# EAGLE board 1IRTG4=Pittonet Benjamin PIC v2 (EAGLE 7.7.0)
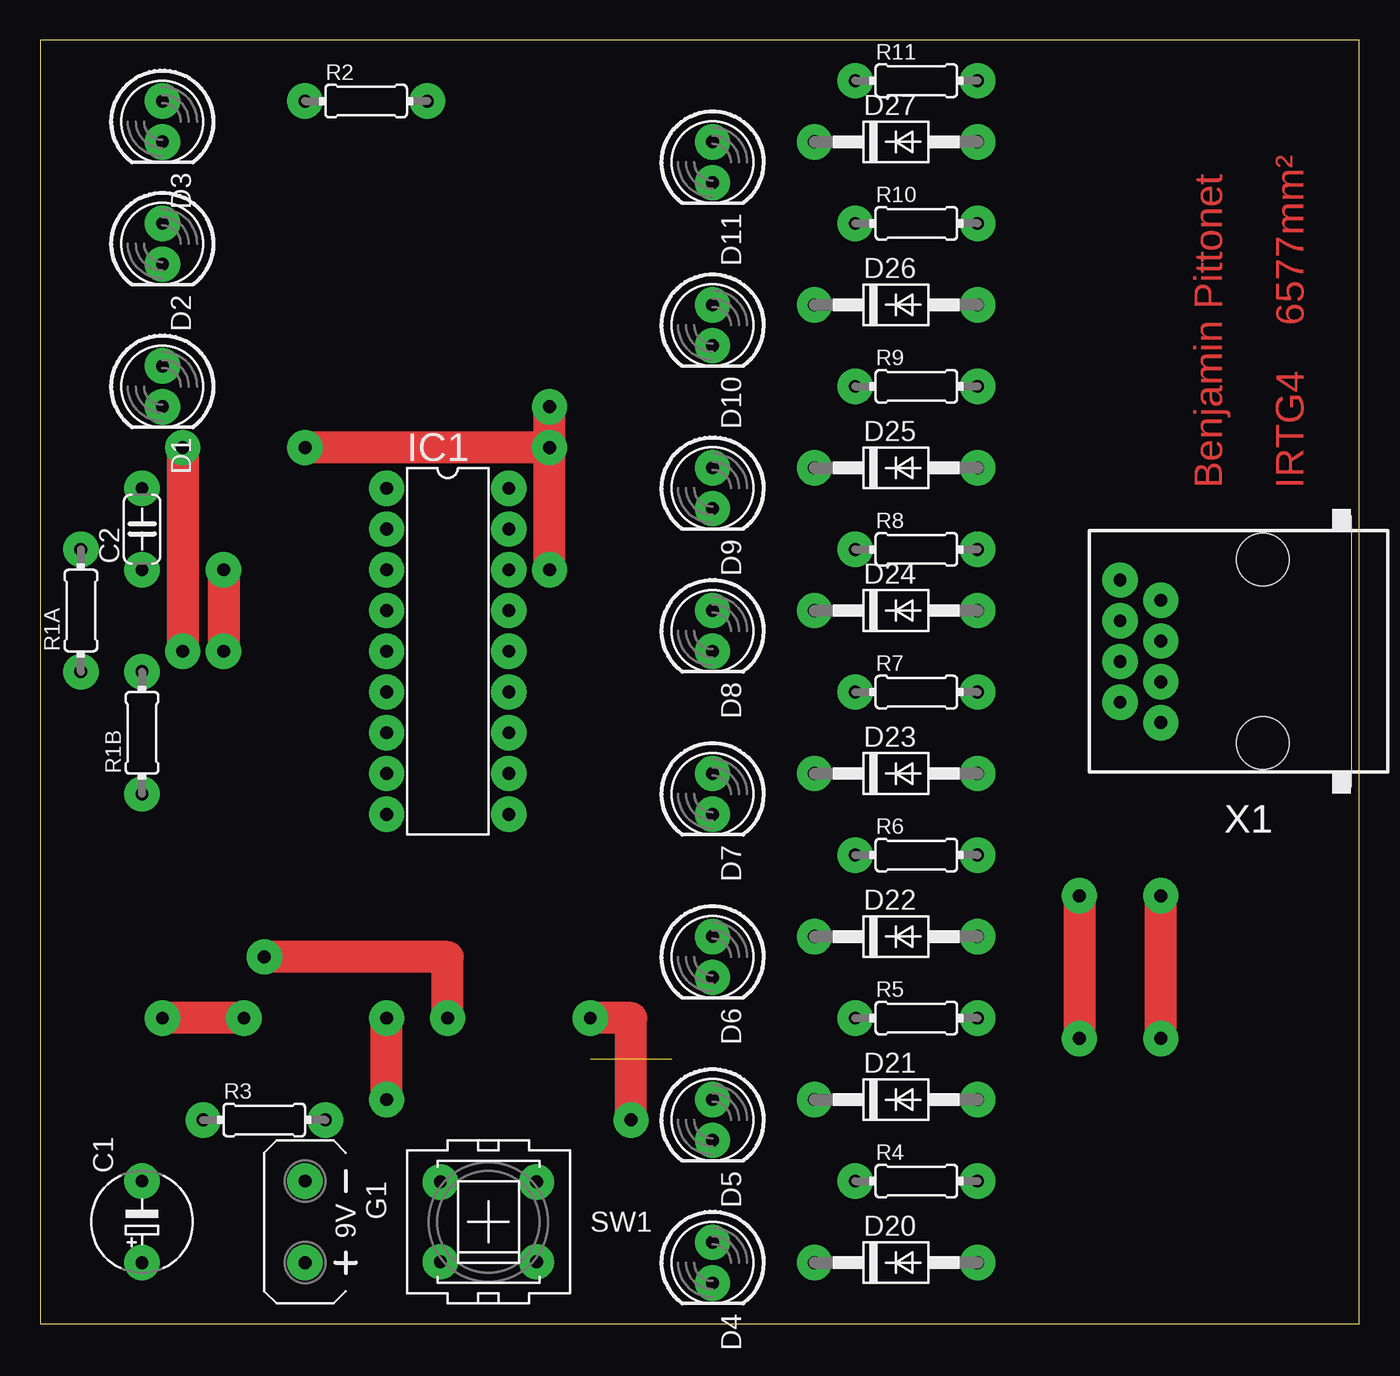
[diagram p0: board, top side]
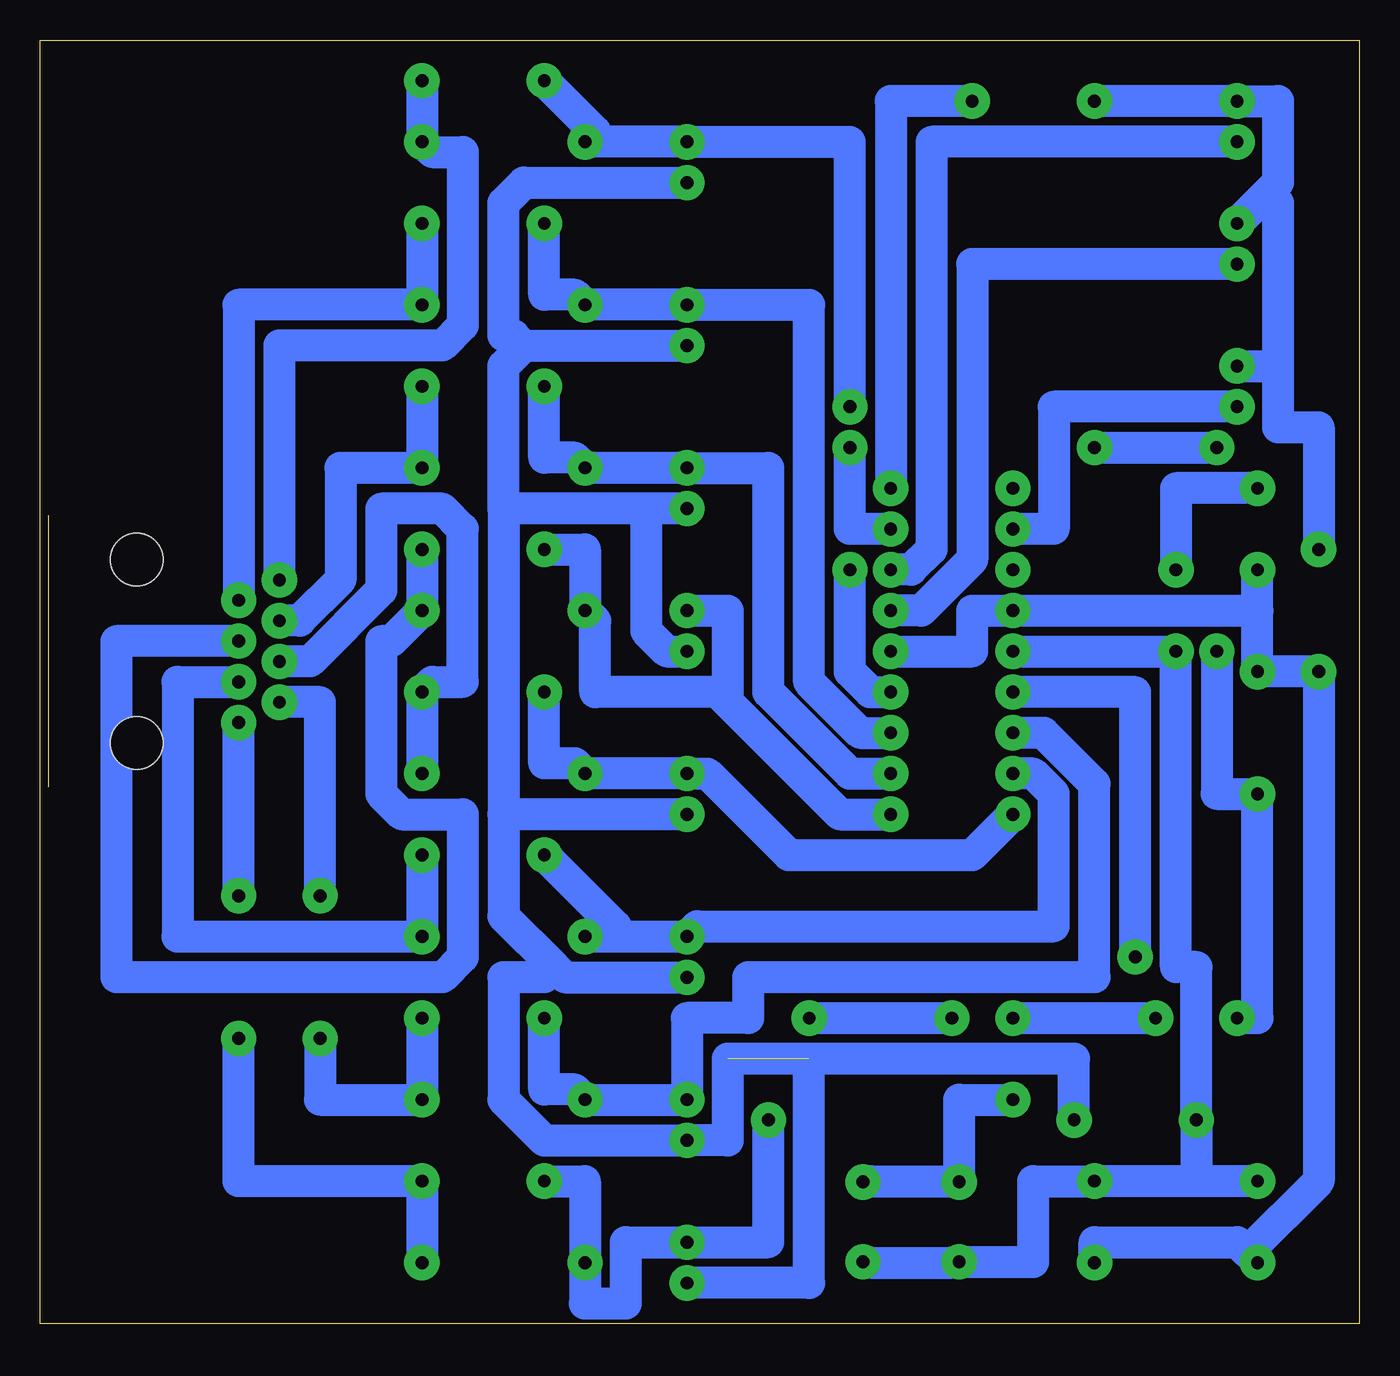
[diagram p1: board, bottom side, seen from below]

Size 82.22 x 80 mm. Coordinates in mm from the lower left corner, seen from the top.
Outline: 0,0 82.22,0 82.22,80 0,80 0,0
Copper layers (1*16): Top 0.035mm / dielectric 1.5mm / Bottom 0.035mm
Design rules "default": minimum track width 10mil, minimum drill 24mil, track to track 8mil, track to pad 8mil, pad to pad 8mil, via to via 8mil, smd to smd 8mil, copper to edge 40mil, drill to drill 8mil, minimum pad ring 10mil, minimum via ring 8mil, stop-mask expansion 4mil, vias tented up to drill 0mil, thermal gap 10mil
Net classes: 0 default: width 2 mm, drill 0.8 mm, clearance 0.2 mm

## Footprints (pad centres in the part's own frame; a part is rotated, then mirrored left to right if it is on the bottom)
E5-6 = drill 0.8 pad 2.2: + -2.54,0; - 2.54,0
C050-024X044 = drill 0.8 pad 2.2: 1 -2.54,0; 2 2.54,0
LED5MM = drill 0.8 pad 2.2: A -1.27,0; K 1.27,0
DO41-10 = drill 0.8 pad 2.2: A 5.08,0; C -5.08,0
AB9V = drill 0.8 pad 2.2: + 0,2.54; - 0,-2.54
DIL18 = drill 0.8 pad 2.2: 1 -10.16,-3.81; 2 -7.62,-3.81; 3 -5.08,-3.81; 4 -2.54,-3.81; 5 0,-3.81; 6 2.54,-3.81; 7 5.08,-3.81; 8 7.62,-3.81; 9 10.16,-3.81; 10 10.16,3.81; 11 7.62,3.81; 12 5.08,3.81; 13 2.54,3.81; 14 0,3.81; 15 -2.54,3.81; 16 -5.08,3.81; 17 -7.62,3.81; 18 -10.16,3.81
0204/7 = drill 0.8 pad 2.2: 1 -3.81,0; 2 3.81,0
PVA1R = drill 0.8 pad 2.2: 1 -2.997,2.489; 2 -2.997,-2.489; 3 2.997,2.489; 4 2.997,-2.489
RJ45-NO-SHIELD = drill 0.8 pad 2.2: 1 -4.445,6.35; 2 -3.175,8.89; 3 -1.905,6.35; 4 -0.635,8.89; 5 0.635,6.35; 6 1.905,8.89; 7 3.175,6.35; 8 4.445,8.89 | hole 3.251: -5.715,0; 5.715,0

## Placement (x,y rotation side)
C1  100µ  [E5-6]  6.35,6.35 90 top
C2  100n  [C050-024X044]  6.35,49.53 90 top
D1  [LED5MM]  7.62,58.42 270 top
D2  [LED5MM]  7.62,67.31 270 top
D3  [LED5MM]  7.62,74.93 270 top
D4  [LED5MM]  41.91,3.81 270 top
D5  [LED5MM]  41.91,12.7 270 top
D6  [LED5MM]  41.91,22.86 270 top
D7  [LED5MM]  41.91,33.02 270 top
D8  [LED5MM]  41.91,43.18 270 top
D9  [LED5MM]  41.91,52.07 270 top
D10  [LED5MM]  41.91,62.23 270 top
D11  [LED5MM]  41.91,72.39 270 top
D20  1N4004  [DO41-10]  53.34,3.81 0 top
D21  1N4004  [DO41-10]  53.34,13.97 0 top
D22  1N4004  [DO41-10]  53.34,24.13 0 top
D23  1N4004  [DO41-10]  53.34,34.29 0 top
D24  1N4004  [DO41-10]  53.34,44.45 0 top
D25  1N4004  [DO41-10]  53.34,53.34 0 top
D26  1N4004  [DO41-10]  53.34,63.5 0 top
D27  1N4004  [DO41-10]  53.34,73.66 0 top
G1  AB9V  [AB9V]  16.51,6.35 180 top
IC1  PIC16F627P  [DIL18]  25.4,41.91 270 top
R1A  720  [0204/7]  2.54,44.45 90 top
R1B  720  [0204/7]  6.35,36.83 90 top
R2  10k  [0204/7]  20.32,76.2 0 top
R3  [0204/7]  13.97,12.7 0 top
R4  [0204/7]  54.61,8.89 0 top
R5  [0204/7]  54.61,19.05 0 top
R6  [0204/7]  54.61,29.21 0 top
R7  [0204/7]  54.61,39.37 0 top
R8  [0204/7]  54.61,48.26 0 top
R9  [0204/7]  54.61,58.42 0 top
R10  [0204/7]  54.61,68.58 0 top
R11  [0204/7]  54.61,77.47 0 top
SW1  PVA1R  [PVA1R]  27.94,6.35 0 top
X1  RJ45-6L-B  [RJ45-NO-SHIELD]  76.2,41.91 90 top

## Library data of the parts
C1 C2 R1A R1B R2-R11 = rcl
D1-D11 = led
D20-D27 = diode
G1 = battery
IC1 = microchip; MF: MICROCHIP; MPN: PIC16F627-20I/P; OC_FARNELL: 1084298; OC_NEWARK: 23C4967
SW1 = switch-misc
X1 = con-tycoelectronics; MPN: RJ45-6L-B; OC_FARNELL: unknown; OC_NEWARK: 16R6090

## Nets
N$1: D21.A R5.2 X1.2
N$2: D4.K D5.K D6.K D7.K D8.K D9.K D10.K D11.K R3.2
N$3: D4.A D20.C IC1.6 R4.1
N$4: D3.K IC1.16
N$5: D2.K IC1.15
N$6: D1.K IC1.2
N$7: D1.A D2.A D3.A R1A.2 R2.1
N$8: IC1.18 R2.2
N$10: D22.A R6.2 X1.3
N$11: C1.+ C2.1 G1.+ IC1.14 R1A.1 R1B.2
N$12: D20.A R4.2 X1.1
N$13: D23.A R7.2 X1.4
N$14: IC1.17 R1B.1 SW1.1 SW1.3
N$15: D25.A R9.2 X1.6
N$16: D26.A R10.2 X1.7
N$17: D27.A R11.2 X1.8
N$18: D5.A D21.C IC1.7 R5.1
N$19: D6.A D22.C IC1.8 R6.1
N$20: D7.A D23.C IC1.9 R7.1
N$21: D8.A D24.C IC1.10 R8.1
N$22: D9.A D25.C IC1.11 R9.1
N$23: D10.A D26.C IC1.12 R10.1
N$24: D11.A D27.C IC1.13 R11.1
N$25: D24.A R8.2 X1.5
N$26: C1.- C2.2 G1.- IC1.5 R3.1 SW1.2 SW1.4

## Tracks (layer width: path | path; a pad name or v marks a point on that pad's centre or on a via)
N$1  (via drill 0.8 pad 2.2)
  Top 2: v64.77,26.67 v64.77,17.78
  Bottom 2: R5.2 D21.A 64.77,13.97 v64.77,17.78 | v64.77,26.67 64.77,38.73 X1.2
N$2  (1 unrouted)
  Bottom 2: D4.K 34.29,2.54 34.29,16.51 | D6.K 49.53,21.59 50.16,22.23 | 50.16,22.23 53.34,25.4 53.34,31.75 | D7.K 53.34,31.75 | D8.K 43.18,41.91 44.45,43.18 44.45,50.8 | D9.K 44.45,50.8 | 52.07,60.96 D10.K | 52.07,60.96 53.34,59.69 53.34,50.8 | 44.45,50.8 53.34,50.8 | D11.K 52.07,71.12 53.34,69.85 53.34,61.59 52.7,61.59 52.07,60.96 | 53.34,50.8 53.34,31.75 | 50.16,22.23 50.8,21.59 53.34,21.59 53.34,13.97 50.8,11.43 D5.K 39.37,11.43 39.37,16.51 34.29,16.51 | R3.2 17.78,16.51 34.29,16.51
N$3  (via drill 0.8 pad 2.2)
  Top 2: v36.83,12.7 36.83,19.05 v34.29,19.05 | v25.4,19.05 25.4,22.86 v13.97,22.86
  Bottom 2: R4.1 48.26,8.89 D20.C 48.26,1.27 45.72,1.27 45.72,5.08 D4.A 36.83,5.08 v36.83,12.7 | v34.29,19.05 v25.4,19.05 | v13.97,22.86 13.97,39.37 IC1.6
N$4
  Bottom 2: IC1.16 27.94,46.99 26.67,48.26 26.67,73.66 D3.K
N$5
  Bottom 2: IC1.15 27.3,44.45 24.13,47.62 24.13,66.04 D2.K
N$6
  Bottom 2: D1.K 19.05,57.15 19.05,49.53 IC1.2
N$7
  Bottom 2: R1A.2 2.54,55.88 5.08,55.88 5.08,59.69 | D1.A 5.08,59.69 | 5.71,70.48 5.08,71.12 5.08,76.2 D3.A R2.1 | 5.71,70.48 D2.A | 5.08,59.69 5.08,69.85 5.71,70.48
N$8
  Bottom 2: IC1.18 29.21,76.2 R2.2
N$10
  Bottom 2: R6.2 D22.A 73.66,24.13 73.66,40.01 X1.3
N$11
  Bottom 2: 6.99,4.45 7.62,5.08 16.51,5.08 G1.+ | 6.99,4.45 C1.+ | 6.99,4.45 2.54,8.89 R1A.1 R1B.2 6.35,44.45 | 6.35,44.45 C2.1 | IC1.14 24.13,41.91 24.13,44.45 6.35,44.45
N$12  (via drill 0.8 pad 2.2)
  Top 2: v69.85,17.78 v69.85,26.67
  Bottom 2: D20.A R4.2 69.85,8.89 v69.85,17.78 | v69.85,26.67 X1.1
N$13
  Bottom 2: D23.A R7.2 57.78,40.01 55.88,40.01 55.88,49.53 57.15,50.8 60.96,50.8 60.96,45.72 65.41,41.27 X1.4
N$14  (via drill 0.8 pad 2.2)
  Top 2: v21.59,13.97 v21.59,19.05 | v12.7,19.05 v7.62,19.05 | v31.75,54.61 v16.51,54.61 | v8.89,54.61 v8.89,41.91
  Bottom 2: SW1.3 30.48,8.89 25.4,8.89 SW1.1 24.94,13.97 v21.59,13.97 | v21.59,19.05 v12.7,19.05 | v7.62,19.05 6.35,19.05 R1B.1 8.89,33.02 v8.89,41.91 | IC1.17 31.75,49.53 v31.75,54.61 | v16.51,54.61 v8.89,54.61
N$15
  Bottom 2: R9.2 D25.A 63.5,53.34 63.5,46.35 66.04,43.81 X1.6
N$16
  Bottom 2: R10.2 D26.A 69.85,63.5 X1.7
N$17
  Bottom 2: R11.2 D27.A 57.78,73.03 55.88,73.03 55.88,62.23 57.15,60.96 67.31,60.96 X1.8
N$18
  Bottom 2: R5.1 50.8,14.61 48.89,14.61 D21.C D5.A 41.91,19.05 38.1,19.05 38.1,21.59 16.51,21.59 16.51,33.66 19.68,36.83 IC1.7
N$19
  Bottom 2: D22.C 46.35,24.13 | 46.35,24.13 D6.A 41.27,24.77 19.05,24.77 19.05,33.02 20.32,34.29 IC1.8 | R6.1 46.35,24.77 46.35,24.13
N$20
  Bottom 2: IC1.9 24.13,29.21 35.56,29.21 40.64,34.29 D7.A D23.C 48.89,34.92 50.8,34.92 R7.1
N$21
  Bottom 2: R8.1 48.26,48.26 D24.C 47.62,43.81 47.62,39.37 40,39.37 39.37,38.73 | IC1.10 32.38,31.75 39.37,38.73 | 39.37,38.73 39.37,44.45 D8.A
N$22
  Bottom 2: IC1.11 31.75,34.29 36.83,39.37 36.83,53.34 D9.A D25.C 48.89,53.98 50.8,53.98 R9.1
N$23
  Bottom 2: IC1.12 31.11,36.83 34.29,40.01 34.29,63.5 D10.A D26.C 48.89,64.14 50.8,64.14 R10.1
N$24  (via drill 0.8 pad 2.2)
  Top 2: v31.75,46.99 v31.75,57.15
  Bottom 2: IC1.13 30.48,39.37 31.75,40.64 v31.75,46.99 | R11.1 47.62,74.3 D27.C D11.A 31.75,73.66 v31.75,57.15
N$25
  Bottom 2: R8.2 D24.A 60.32,42.55 60.96,42.55 60.96,33.02 59.69,31.75 55.88,31.75 55.88,22.86 57.15,21.59 77.47,21.59 77.47,42.55 X1.5
N$26  (via drill 0.8 pad 2.2)
  Top 2: v11.43,46.99 v11.43,41.91
  Bottom 2: SW1.4 30.48,3.81 25.4,3.81 SW1.2 20.32,3.86 20.32,8.89 G1.- 10.16,8.89 | C1.- 10.16,8.89 | 10.16,8.89 R3.1 10.16,22.23 11.43,22.23 v11.43,41.91 IC1.5 | C2.2 11.43,52.07 v11.43,46.99

## Text on the board
Top: 6577mm² | Benjamin Pittonet | IRTG4